# EAGLE board digital-logic _ analog (EAGLE 6.4)
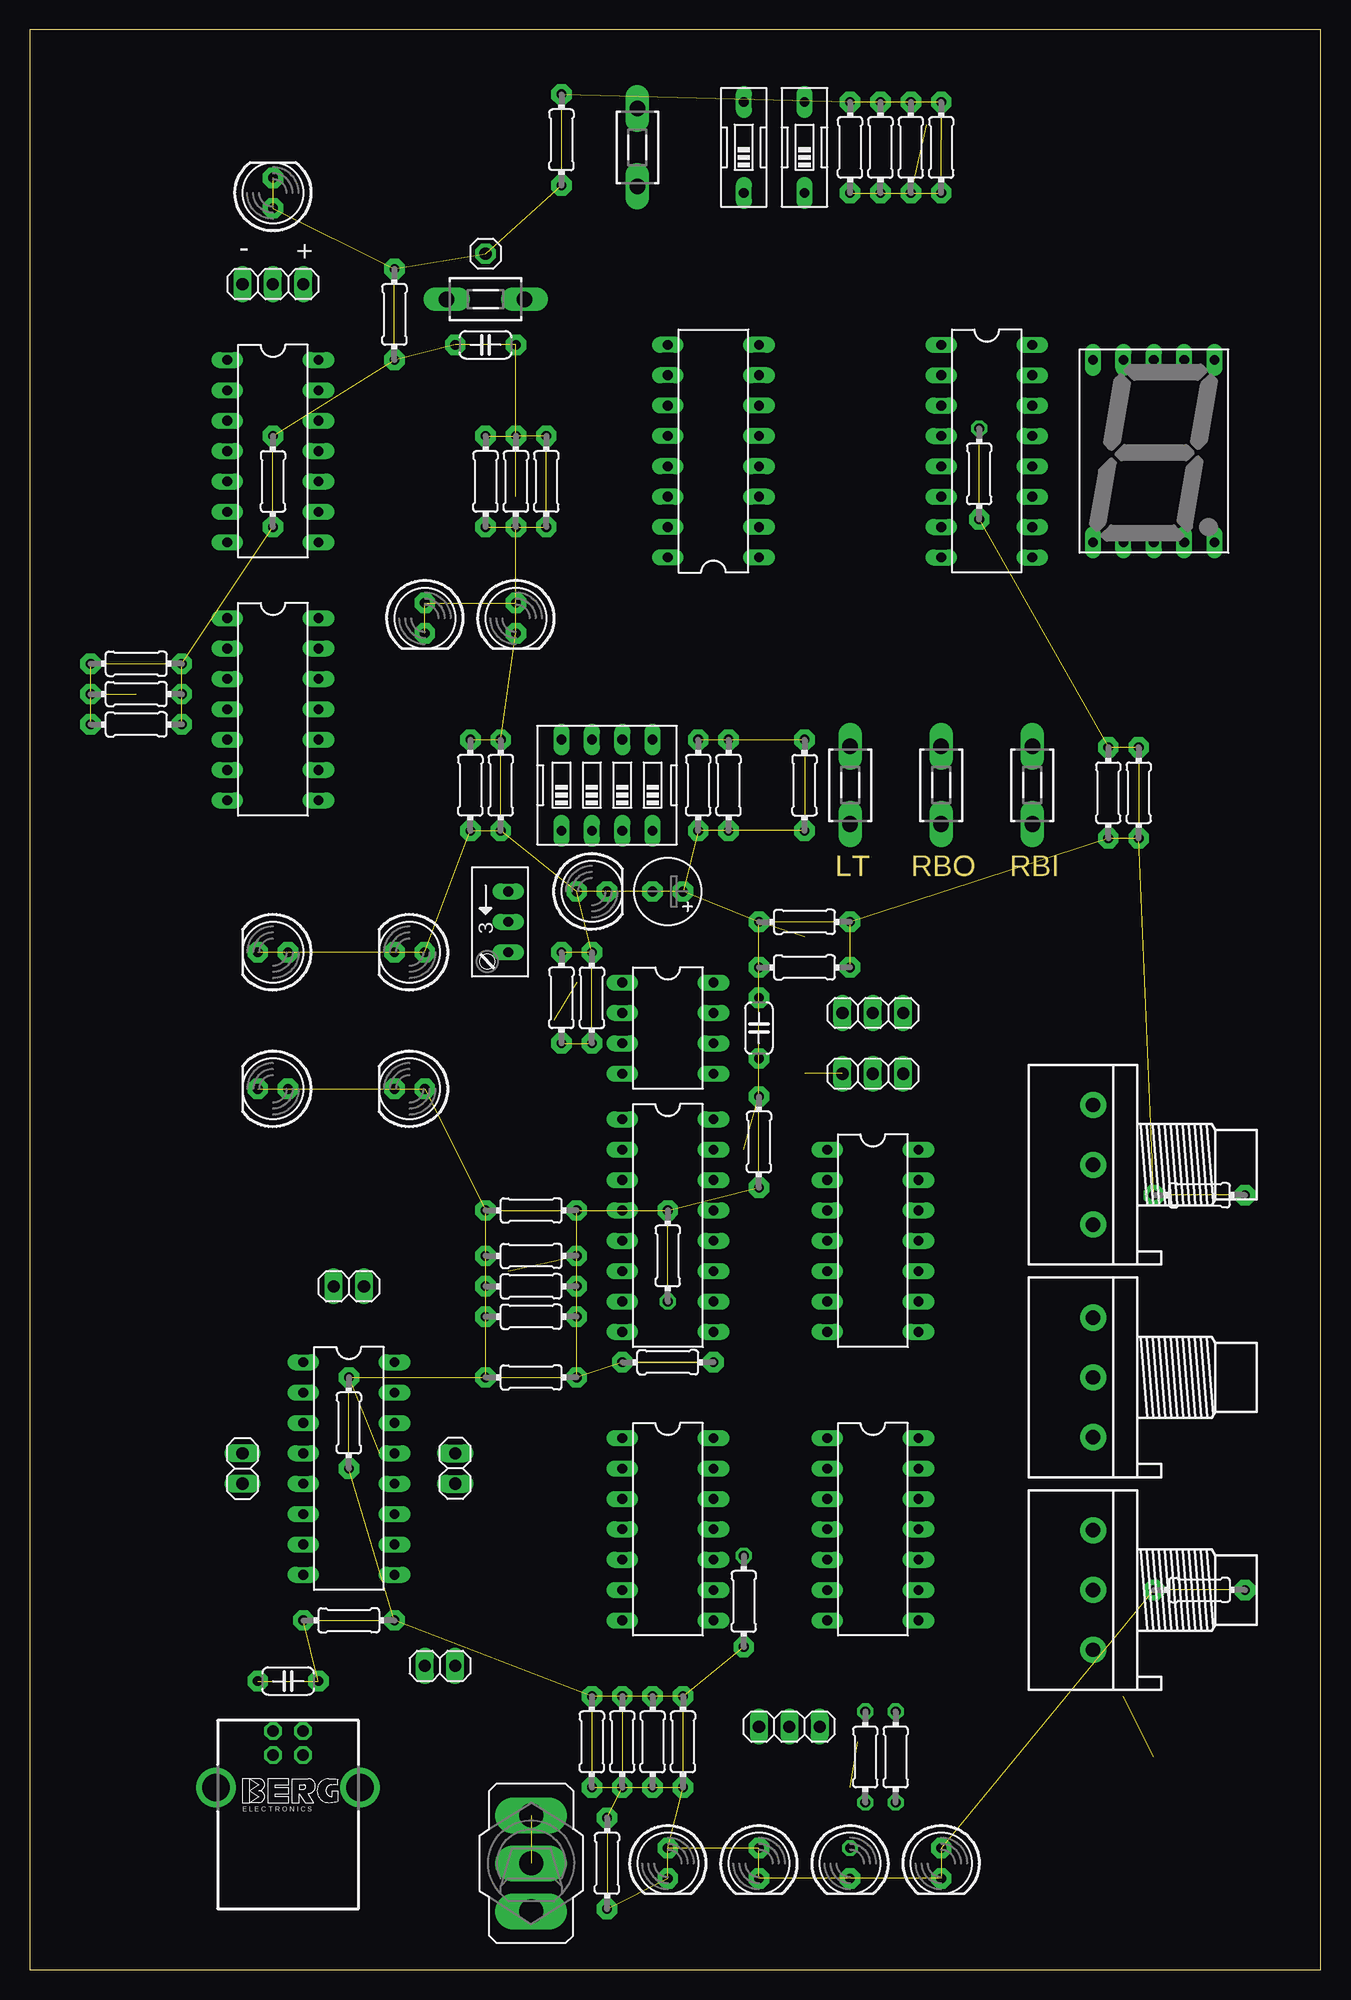
[diagram p0: board, top side]
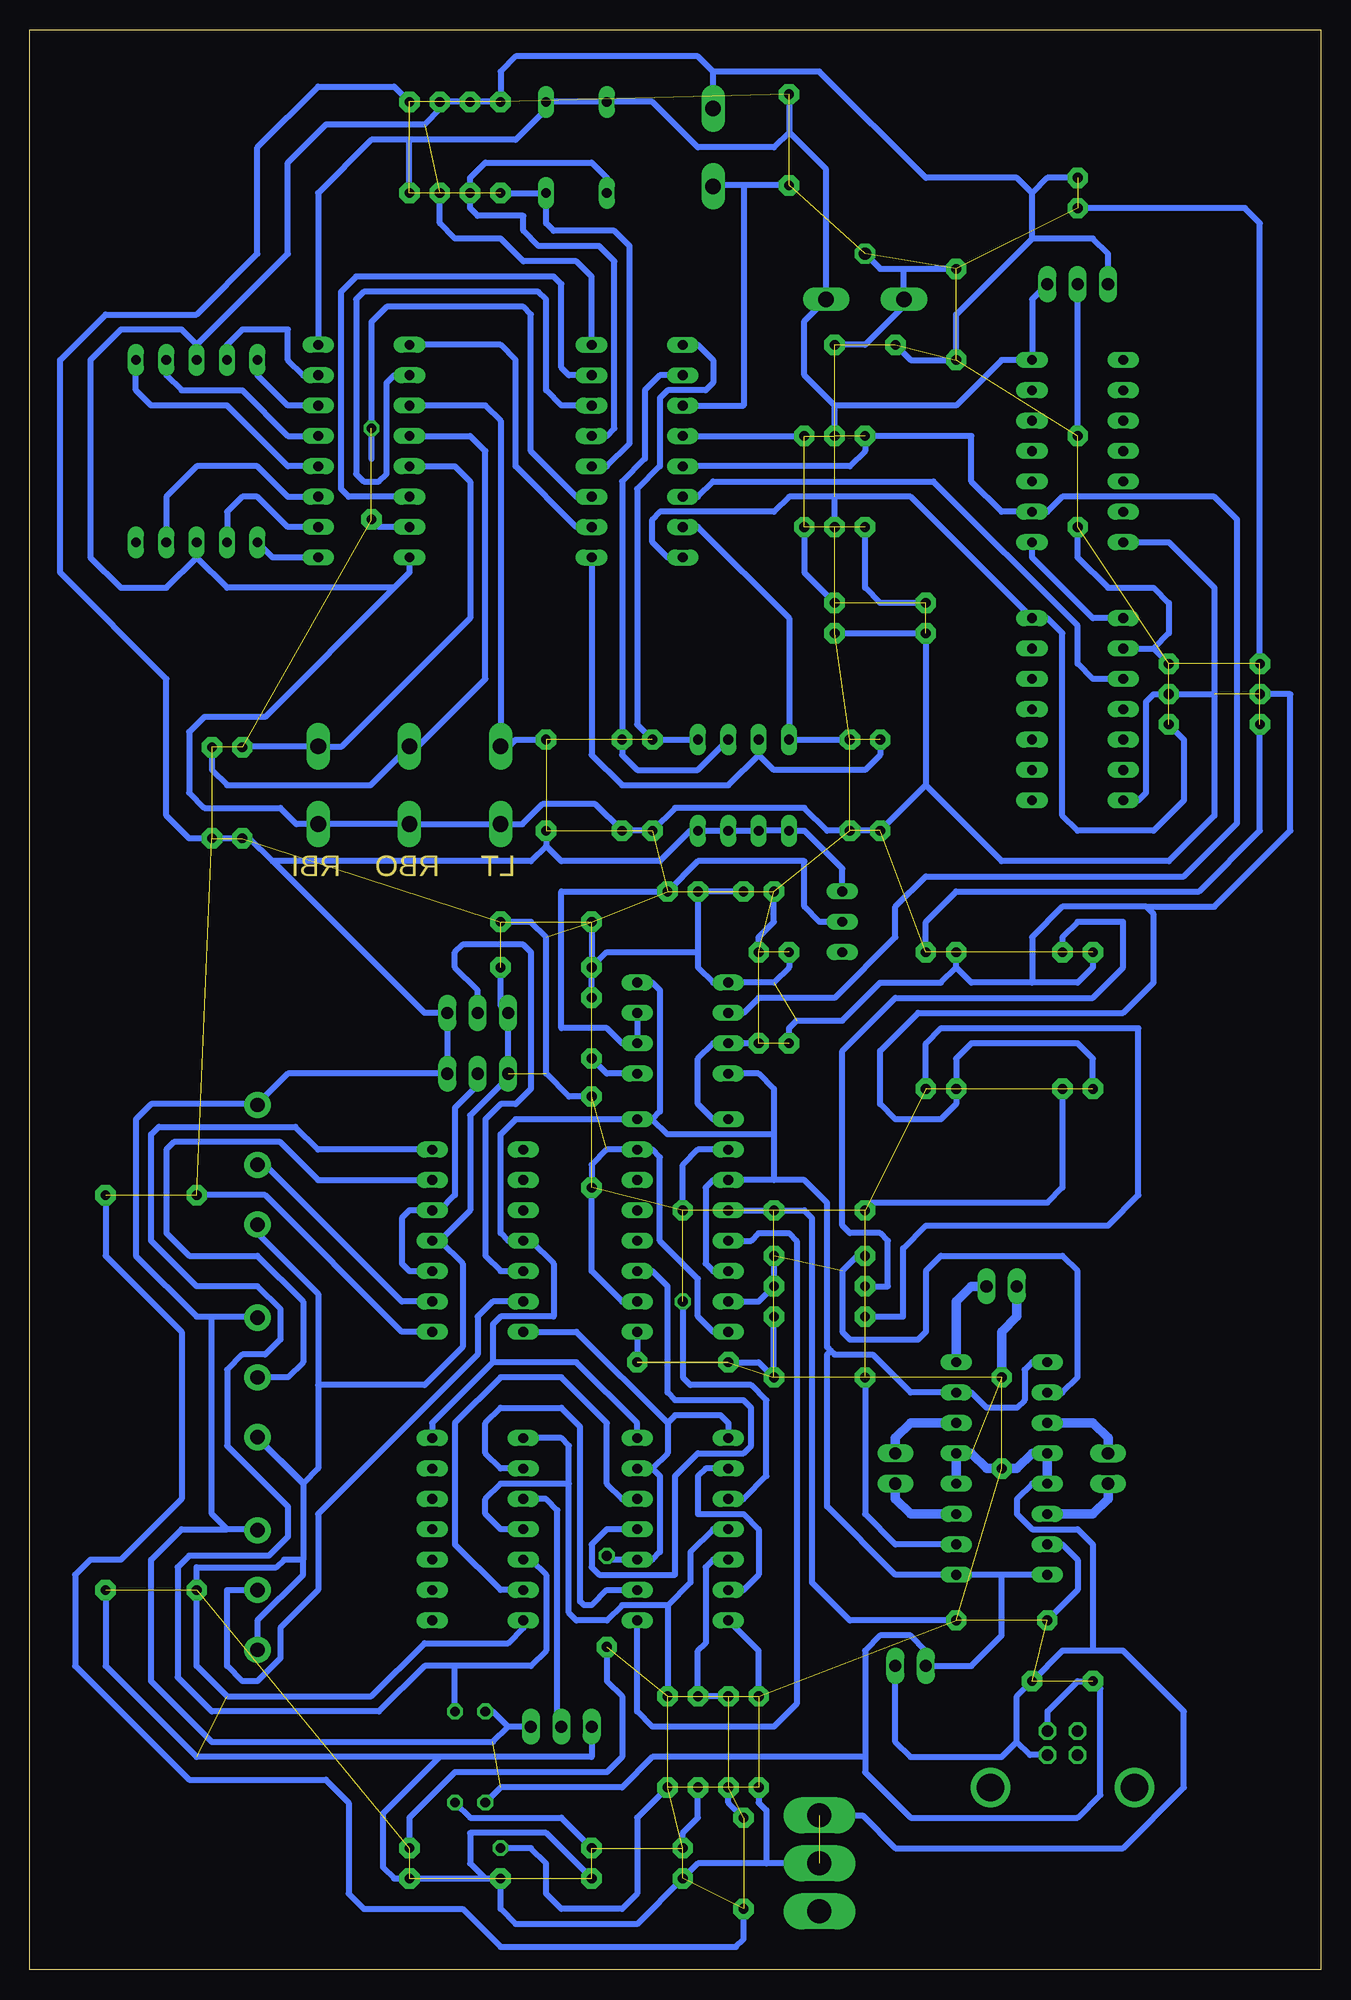
[diagram p1: board, bottom side, seen from below]

Size 107.93 x 162.23 mm. Coordinates in mm from the lower left corner, seen from the top.
Outline: 0,0 107.93,0 107.93,162.23 0,162.23 0,0
Copper layers (1*16): Top 0.035mm / dielectric 1.5mm / Bottom 0.035mm
Design rules "default *": minimum track width 1mm, minimum drill 1mm, track to track 1mm, track to pad 1mm, pad to pad 1mm, via to via 1mm, smd to smd 8mil, copper to edge 0.5mm, drill to drill 1mm, minimum pad ring 10mil, minimum via ring 8mil, stop-mask expansion 4mil, vias tented up to drill 0mil, thermal gap 10mil

## Footprints (pad centres in the part's own frame; a part is rotated, then mirrored left to right if it is on the bottom)
1X03 = drill 1.016 long: 1 -2.54,0; 2 0,0; 3 2.54,0
C050-024X044 = drill 0.813 octagon: 1 -2.54,0; 2 2.54,0
E2,5-6 = drill 0.813 pad 1.6: + -1.27,0 | drill 0.813 pad 1.6 octagon: - 1.27,0
HDSP-M = drill 0.813 long: 1 -5.08,-7.62; 2 -2.54,-7.62; 3 0,-7.62; 4 2.54,-7.62; 5 5.08,-7.62; 6 5.08,7.62; 7 2.54,7.62; 8 0,7.62; 9 -2.54,7.62; 10 -5.08,7.62
DIL16 = drill 0.813 long: 1 -8.89,-3.81; 2 -6.35,-3.81; 3 -3.81,-3.81; 4 -1.27,-3.81; 5 1.27,-3.81; 6 3.81,-3.81; 7 6.35,-3.81; 8 8.89,-3.81; 9 8.89,3.81; 10 6.35,3.81; 11 3.81,3.81; 12 1.27,3.81; 13 -1.27,3.81; 14 -3.81,3.81; 15 -6.35,3.81; 16 -8.89,3.81
DIL14 = drill 0.813 long: 1 -7.62,-3.81; 2 -5.08,-3.81; 3 -2.54,-3.81; 4 0,-3.81; 5 2.54,-3.81; 6 5.08,-3.81; 7 7.62,-3.81; 8 7.62,3.81; 9 5.08,3.81; 10 2.54,3.81; 11 0,3.81; 12 -2.54,3.81; 13 -5.08,3.81; 14 -7.62,3.81
DIL-08 = drill 0.813 long: 1 -3.81,-3.81; 2 -1.27,-3.81; 3 1.27,-3.81; 4 3.81,-3.81; 5 3.81,3.81; 6 1.27,3.81; 7 -1.27,3.81; 8 -3.81,3.81
1X02 = drill 1.016 long: 1 -1.27,0; 2 1.27,0
1X01 = drill 1.016 octagon: 1 0,0
LED5MM = drill 0.813 octagon: A -1.27,0; K 1.27,0
3RP/1610N = drill 1.2 pad 2.184: 1 -5,0; 2 0,0; 3 5,0
0204/7 = drill 0.813 octagon: 1 -3.81,0; 2 3.81,0
RJ9W = drill 0.813 long: A 2.54,0.635; E -2.54,0.635; S 0,0.635
320-916 = drill 2.007 long: 1 0,4.013; 2 0,0; 3 0,-4.013
DTS-3@1 = drill 1.3 long: 1 -3.25,0; 2 3.25,0
EDG-04 = drill 0.813 long: 1 -3.81,-3.81; 2 -1.27,-3.81; 3 1.27,-3.81; 4 3.81,-3.81; 5 3.81,3.81; 6 1.27,3.81; 7 -1.27,3.81; 8 -3.81,3.81
EDG-01 = drill 0.813 long: 1 0,-3.81; 2 0,3.81
PN61729-S = drill 0.95 octagon: 1 1.25,4.71; 2 -1.25,4.71; 3 -1.25,2.71; 4 1.25,2.71 | drill 2.3 pad 2.9: S1 -6.02,0; S2 6.02,0

## Placement (x,y rotation side)
BLACK  [1X03]  20.32,140.97 0 top
C1  10nF  [C050-024X044]  60.96,78.74 90 top
C2  100nF  [C050-024X044]  21.59,24.13 180 top
C3  100nF  [C050-024X044]  38.1,135.89 180 top
C4  1uF  [E2,5-6]  53.34,90.17 180 top
DIS1  HD-H103  [HDSP-M]  93.98,127 0 top
FLAME  [1X03]  70.48,80.01 0 top
IC1  L293D  [DIL16]  26.67,41.91 270 top
IC2  LM324N  [DIL14]  70.48,60.96 270 top
IC3  74LS32N  [DIL14]  53.34,36.83 270 top
IC4  74ALS04N  [DIL14]  70.48,36.83 270 top
IC5  74LS157N  [DIL16]  53.34,62.23 270 top
IC6  74190N  [DIL16]  57.15,127 90 top
IC7  NE555  [DIL-08]  53.34,78.74 270 top
IC8  74LS48N  [DIL16]  80.01,127 270 top
IC9  74LS32N  [DIL14]  20.32,105.41 270 top
IC10  74LS04N  [DIL14]  20.32,127 270 top
IR  [1X03]  63.5,20.32 180 top
JP2  [1X02]  26.67,57.15 0 top
JP3  [1X02]  34.29,25.4 0 top
JP4  [1X02]  17.78,41.91 90 top
JP5  [1X02]  35.56,41.91 270 top
JP7  [1X01]  38.1,143.51 0 top
LED1  [LED5MM]  53.34,8.89 270 top
LED2  [LED5MM]  60.96,8.89 270 top
LED3  [LED5MM]  68.58,8.89 270 top
LED4  [LED5MM]  76.2,8.89 270 top
LED5  [LED5MM]  31.75,85.09 180 top
LED6  [LED5MM]  31.75,73.66 180 top
LED7  [LED5MM]  20.32,85.09 180 top
LED8  [LED5MM]  20.32,73.66 180 top
LED9  [LED5MM]  33.02,113.03 270 top
LED10  [LED5MM]  40.64,113.03 270 top
LED11  [LED5MM]  20.32,148.59 90 top
LED12  [LED5MM]  46.99,90.17 0 top
R1  [3RP/1610N]  88.9,31.75 90 top
R2  [3RP/1610N]  88.9,67.31 90 top
R3  [3RP/1610N]  88.9,49.53 90 top
R4  [0204/7]  8.89,104.14 0 top
R5  [0204/7]  41.91,54.61 0 top
R6  [0204/7]  41.91,57.15 0 top
R7  [0204/7]  41.91,63.5 0 top
R8  [0204/7]  52.07,19.05 90 top
R9  [0204/7]  72.39,17.78 90 top
R10  [0204/7]  54.61,19.05 90 top
R11  [0204/7]  59.69,30.8 90 top
R13  [0204/7]  8.89,109.22 0 top
R14  [0204/7]  43.18,124.46 90 top
R15  [0204/7]  39.37,99.06 90 top
R16  [0204/7]  36.83,99.06 90 top
R17  [0204/7]  58.42,99.06 90 top
R18  [0204/7]  55.88,99.06 90 top
R19  [0204/7]  38.1,124.46 90 top
R20  [0204/7]  92.71,98.42 270 top
R21  [0204/7]  90.17,98.42 270 top
R22  [0204/7]  64.77,99.06 270 top
R23  [0204/7]  68.58,152.4 90 top
R24  [0204/7]  71.12,152.4 90 top
R25  [0204/7]  44.45,153.03 90 top
R26  [0204/7]  30.48,138.43 90 top
R27  0  [0204/7]  79.38,125.09 90 top
R28  0  [0204/7]  73.66,152.4 90 top
R29  0  [0204/7]  40.64,124.46 90 top
R30  0  [0204/7]  41.91,59.69 0 top
R31  0  [0204/7]  53.34,50.8 0 top
R32  0  [0204/7]  41.91,49.53 0 top
R33  0  [0204/7]  46.99,19.05 90 top
R34  0  [0204/7]  26.67,45.72 90 top
R35  0  [0204/7]  53.34,59.69 90 top
R36  0  [0204/7]  20.32,124.46 270 top
R37  0  [0204/7]  44.45,81.28 90 top
R38  0  [0204/7]  69.85,17.78 90 top
R39  0  [0204/7]  97.79,31.75 180 top
R40  0  [0204/7]  8.89,106.68 0 top
R41  0  [0204/7]  76.2,152.4 90 top
R42  0  [0204/7]  64.77,83.82 0 top
R43  0  [0204/7]  60.96,69.22 90 top
R44  0  [0204/7]  64.77,87.63 0 top
R45  0  [0204/7]  26.67,29.21 180 top
R46  0  [0204/7]  97.79,64.77 0 top
R47  0  [0204/7]  48.26,8.89 90 top
R48  0  [0204/7]  49.53,19.05 90 top
R49  [0204/7]  46.99,81.28 270 top
R50  [RJ9W]  39.37,87.63 270 top
S1  [320-916]  41.91,8.89 0 top
S5  DTS-3  [DTS-3@1]  38.1,139.7 180 top
SHARP  [1X03]  70.48,74.93 0 top
SW1  [EDG-04]  48.26,99.06 0 top
SW2  DTS-3  [DTS-3@1]  76.2,99.06 270 top
SW3  DTS-3  [DTS-3@1]  83.82,99.06 270 top
SW4  DTS-3  [DTS-3@1]  68.58,99.06 270 top
SW5  [EDG-01]  64.77,152.4 0 top
SW6  [EDG-01]  59.69,152.4 0 top
SW7  DTS-3  [DTS-3@1]  50.8,152.4 90 top
X1  PN61729-S  [PN61729-S]  21.59,15.24 0 top

## Library data of the parts
BLACK FLAME IR JP2-JP5 JP7 SHARP = pinhead
C1-C4 R4-R11 R13-R49 = rcl
DIS1 = display-hp; OC_FARNELL: unknown; OC_NEWARK: unknown
IC1 = st-microelectronics; MPN: L293D; OC_FARNELL: 9589619; OC_NEWARK: 56P8249
IC2 = linear
IC3-IC6 IC8-IC10 = 74xx-us
IC7 = st-microelectronics; MF: Arrow Electronics; MPN: NE555N; OC_FARNELL: 1467742; OC_NEWARK: 89K1486
LED1-LED12 = led
R1-R3 R50 = pot
S1 = switch
S5 SW2-SW4 SW7 = switch-tact
SW1 SW5 SW6 = special
X1 = con-berg; OC_FARNELL: unknown; OC_NEWARK: unknown

## Nets
BLACK: BLACK.2 IC9.2 R13.2 R36.1 R36.2
CLK: IC6.14 IC9.3
DIS: C4.+ IC7.6 IC7.7 R50.S
FLAME: IC2.7 IC3.1 IC3.10 IC3.13 R11.2
FRONT: IC3.4 IC4.1 IC4.4 R10.2
FRONT': IC4.3 IR.2
GND: BLACK.1 C1.2 C2.1 C3.2 C4.- DIS1.3 DIS1.8 FLAME.1 IC1.4 IC1.5 IC1.12 IC1.13 IC2.11 IC3.7 IC4.7 IC5.8 IC5.10 IC5.15 IC6.8 IC7.1 IC8.8 IC9.7 IC10.7 IR.3 JP2.1 JP3.2 LED1.K LED2.K LED3.K LED4.K LED5.K LED6.K LED7.K LED8.K LED9.K LED10.K LED11.K LED12.K R1.1 R2.1 R3.1 R15.1 R16.1 R17.1 R18.1 R23.2 R24.2 R26.1 R28.1 R28.2 R33.1 R33.2 R34.1 R34.2 R37.1 R37.2 R39.1 R39.2 R40.1 R40.2 R42.1 R42.2 R43.1 R43.2 R44.1 R44.2 S1.1 S1.2 SHARP.1 SW2.2 SW3.2 SW4.2 SW7.2 X1.4
HAMADA: IC1.11 JP5.2
L1: IC1.2 IC5.7 R6.2 R30.1 R30.2
L2: IC1.7 IC5.4 R7.2 R45.1 R45.2
LOGIC_L1: IC3.8 IC5.5
LOGIC_L2: IC3.3 IC5.2 R35.1 R35.2
LOGIC_R2: IC3.11 IC5.11
MAX: IC2.14 IC4.5 R9.2
MIN: IC2.8 IC3.5 R8.2 R46.1 R46.2 R47.1 R47.2 R48.1 R48.2
MOTOR_SUPPLY: IC1.16 JP2.2
N$1: FLAME.2 IC2.5
N$2: IC2.10 IC2.12 SHARP.2
N$3: LED5.A R4.1
N$4: IC3.12 IC4.6
N$5: IC2.6 R1.2
N$6: C1.1 IC7.5
N$7: LED6.A R5.1
N$8: IC3.2 IC3.6
N$9: LED7.A R6.1
N$10: LED8.A R7.1
N$11: IC2.9 R2.2
N$12: IC1.14 JP5.1
N$13: IC1.3 JP4.2
N$14: IC1.6 JP4.1
N$15: LED12.A R49.1
N$16: IC2.13 R3.2
N$17: LED1.A R8.1
N$18: LED11.A R13.1
N$22: IC3.9 IC4.2
N$24: LED2.A R9.1
N$25: LED3.A R10.1
N$26: LED4.A R11.1
N$28: IC9.1 IC10.8
N$40: IC6.3 IC8.7 R27.1 R27.2
N$41: IC6.2 IC8.1
N$42: IC6.6 IC8.2
N$43: IC6.7 IC8.6
N$44: IC6.15 R15.2 SW1.8
N$45: IC6.1 R16.2 SW1.7
N$46: IC6.10 R17.2 SW1.6
N$47: IC6.9 R18.2 SW1.5
N$48: IC6.4 R23.1 SW5.1
N$49: IC6.5 R24.1 SW6.1
N$50: IC6.11 R25.1 SW7.1
N$51: IC8.4 R20.1 SW2.1
N$52: IC8.5 R21.1 SW3.1
N$53: IC8.3 R22.1 SW4.1
N$54: DIS1.7 IC8.13
N$55: DIS1.6 IC8.12
N$56: DIS1.4 IC8.11
N$57: DIS1.2 IC8.10
N$58: DIS1.1 IC8.9
N$59: DIS1.9 IC8.15
N$60: DIS1.10 IC8.14
N$62: IC6.12 R14.2
N$63: LED9.A R19.1
N$64: LED10.A R14.1
N$65: C3.1 JP7.1 R26.2 S5.2
R2: IC1.10 IC5.9 R5.2 R31.1 R31.2 R32.1 R32.2
RCO: IC6.13 IC7.2 IC10.9 R19.2
SENSE: IC5.1 IC7.3 R49.2
VCC: BLACK.3 C2.2 FLAME.3 IC1.1 IC1.8 IC1.9 IC1.15 IC2.4 IC3.14 IC4.14 IC5.3 IC5.6 IC5.16 IC6.16 IC7.4 IC7.8 IC8.16 IC9.14 IC10.14 IR.1 JP3.1 R1.3 R2.3 R3.3 R4.2 R20.2 R21.2 R22.2 R25.2 R29.1 R29.2 R38.1 R38.2 R41.1 R41.2 R50.E S5.1 SHARP.3 SW1.1 SW1.2 SW1.3 SW1.4 SW5.2 SW6.2 X1.1

## Tracks (layer width: path | path; a pad name or v marks a point on that pad's centre or on a via)
BLACK  (1 unrouted)
  Bottom 0.5: 20.32,142.24 BLACK.2 R36.1 | 13.97,110.49 12.7,111.76 12.7,114.3 13.97,115.57 17.78,115.57 20.32,118.11 R36.2 | IC9.2 13.97,110.49 | 13.97,110.49 R13.2
CLK
  Bottom 0.5: IC6.14 52.07,123.19 50.8,124.46 32.38,124.46 20.32,112.39 20.32,109.22 19.05,107.95 IC9.3
DIS
  Bottom 0.5: IC7.7 IC7.6 58.42,77.47 59.69,78.74 63.5,78.74 63.5,90.17 C4.+ 52.07,92.71 43.18,92.71 43.18,88.9 41.91,87.63 R50.S
FLAME
  Bottom 0.5: IC2.7 62.23,53.34 54.61,45.72 | 54.61,45.72 54.61,43.18 55.88,41.91 | IC3.1 49.53,45.72 50.16,46.35 53.98,46.35 54.61,45.72 | IC3.13 55.88,41.91 | 55.88,41.91 55.24,41.27 55.24,34.92 55.88,34.29 IC3.10 59.37,34.29 R11.2
FRONT
  Bottom 0.5: IC4.4 68.58,36.83 69.85,38.1 69.85,39.37 68.58,40.64 62.87,40.64 | IC4.1 63.5,44.45 62.87,43.81 62.87,40.64 | IC3.4 50.8,36.83 52.7,34.92 52.7,32.38 54.61,30.48 | 54.61,30.48 58.42,30.48 59.69,29.21 62.23,29.21 62.87,29.84 62.87,40.64 | 54.61,30.48 R10.2
FRONT'
  Bottom 0.5: IC4.3 64.77,39.37 63.82,38.42 63.82,21.27 63.5,20.95 IR.2
GND  (10 unrouted)
  Bottom 0.5: 88.9,26.67 R1.1 88.9,29.21 85.09,33.02 85.09,34.29 | 73.66,60.96 IC2.11 | 73.66,60.96 71.12,63.5 71.12,71.44 67.94,74.61 SHARP.1 FLAME.1 68.58,80.64 R42.2 | 85.09,40.64 85.09,40.72 R3.1 | 88.9,44.45 85.09,40.64 | 85.09,40.64 85.09,34.29 | 85.09,34.29 86.68,34.29 87.31,33.66 93.98,33.66 R39.2 93.98,25.4 91.44,22.86 79.38,22.86 74.93,27.3 67.94,27.3 66.67,28.57 IC4.7 | R2.1 88.9,61.59 83.82,56.52 83.82,48.9 | 83.82,48.9 74.93,48.9 71.75,52.07 71.75,59.05 73.66,60.96 | 83.82,48.9 83.82,41.91 85.09,40.64 | SW7.2 50.8,158.75 | 50.8,158.75 52.07,160.02 67.31,160.02 68.58,158.75 R23.2 R24.2 R28.2 73.66,155.57 74.93,154.31 83.19,154.31 86.36,151.13 86.36,143.51 93.98,135.89 | 93.98,118.11 91.44,115.57 77.47,115.57 | 93.98,118.11 DIS1.3 | DIS1.8 93.98,135.89 | 93.98,135.89 95.25,137.16 100.33,137.16 102.87,134.62 102.87,118.11 100.33,115.57 96.52,115.57 93.98,118.11 | LED10.K LED9.K 33.02,99.06 | R28.1 73.66,146.05 72.39,144.78 68.58,144.78 66.67,142.88 62.23,142.88 60.96,141.6 IC6.8 | IC8.8 76.2,116.84 77.47,115.57 | 77.47,115.57 88.27,104.78 93.34,104.78 94.61,103.5 94.61,98.42 93.34,97.16 87,97.16 85.65,95.81 SW3.2 SW2.2 SW4.2 66.75,95.81 65.09,97.47 60.64,97.47 R17.1 R18.1 53.98,97.16 43.18,97.16 41.27,95.25 R15.1 R16.1 33.02,99.06 | 52.07,85.09 52.07,83.82 50.8,82.55 IC7.1 45.72,82.55 44.45,83.82 R37.2 | 52.07,85.09 59.69,85.09 R42.1 | C3.2 34.29,134.62 R26.1 30.48,138.43 24.13,144.78 | LED2.K 64.77,11.43 71.12,11.43 71.12,8.89 69.85,7.62 | 69.85,7.62 LED3.K 68.58,5.08 67.31,3.81 57.15,3.81 LED1.K 52.07,8.89 46.35,8.89 | 69.85,7.62 LED4.K 77.47,7.62 78.42,8.57 78.42,13.02 73.66,17.78
  Bottom 0.5: BLACK.1 17.78,143.51 19.05,144.78 24.13,144.78 | LED11.K 22.86,149.86 24.13,148.59 | 33.02,99.06 26.67,92.71 12.7,92.71 8.89,96.52 8.89,106.68 | 8.89,106.68 8.89,115.57 12.7,119.38 IC10.7 | X1.4 24.3,17.95 25.4,19.05 | 25.4,19.05 25.4,22.86 C2.1 21.59,26.67 19.05,26.67 | 25.4,19.05 26.67,17.78 34.29,17.78 35.56,19.05 JP3.2 | 24.13,144.78 24.13,148.59 | 24.13,148.59 25.4,149.86 33.02,149.86 41.91,158.75 50.8,158.75 | S1.1 38.3,12.9 35.56,10.16 16.51,10.16 11.43,15.24 11.43,21.59 16.51,26.67 19.05,26.67 | LED7.K 19.05,83.82 20.32,82.55 24.13,82.55 | 24.13,82.55 29.21,82.55 30.48,83.82 | 30.48,83.82 LED5.K | LED8.K 19.05,76.2 20.32,77.47 29.21,77.47 30.48,76.2 LED6.K 30.48,72.39 31.75,71.12 35.56,71.12 36.83,72.39 36.83,76.83 33.66,80.01 16.51,80.01 13.97,82.55 13.97,88.27 14.61,88.9 | 14.61,88.9 21.59,88.9 24.13,86.36 24.13,82.55 | IC5.8 50.8,53.34 52.07,54.61 52.07,57.78 55.24,60.96 55.24,67.94 55.88,68.58 IC5.15 59.69,68.58 60.96,67.31 R43.1 60.96,58.42 58.42,55.88 IC5.10 | 30.48,83.82 31.75,82.55 36.83,82.55 40.01,79.38 43.81,79.38 44.45,78.74 R37.1 | IC1.5 24.13,40.64 25.4,39.37 25.4,38.1 24.13,36.83 20.32,36.83 19.05,35.56 19.05,26.67 | S1.2 46.35,8.89 | R33.2 46.99,26.67 IC3.7 | 73.66,17.78 60.96,17.78 IR.3 | 14.61,88.9 8.89,88.9 2.54,95.25 2.54,106.68 R40.1 | 73.66,17.78 93.98,17.78 101.6,25.4 R39.1 | 8.89,106.68 R40.2 13.97,106.68 14.61,106.05 14.61,98.42 15.24,97.79 IC9.7 | R43.2 62.87,73.03 64.77,74.93 64.77,86.36 66.04,87.63 R44.2 | C1.2 R42.1 | R44.1 R42.1 | 52.07,85.09 C4.- LED12.K | R33.1 46.99,13.97 46.35,13.34 46.35,8.89
  Bottom 0.8: IC1.5 IC1.4 24.13,43.18 25.4,41.91 R34.1 27.94,41.91 29.21,43.18 IC1.13 IC1.12 | R34.2 26.67,53.34 25.4,54.61 JP2.1
HAMADA
  Bottom 0.8: JP5.2 35.56,39.37 34.29,38.1 IC1.11
L1  (1 unrouted)
  Bottom 0.5: IC1.2 21.59,48.26 20.32,49.53 20.32,58.42 21.59,59.69 31.75,59.69 33.02,58.42 33.02,53.34 33.66,52.7 39.37,52.7 40.01,53.34 40.01,58.42 38.73,59.69 R30.1 | R30.2 R6.2 46.99,55.88 IC5.7
L2  (1 unrouted)
  Bottom 0.5: IC5.4 R7.2 43.18,63.5 42.55,62.87 42.55,32.38 39.37,29.21 R45.1 | IC1.7 21.59,35.56 20.32,34.29 20.32,31.75 R45.2
LOGIC_L1
  Bottom 0.5: IC3.8 57.15,21.59 55.88,20.32 45.72,20.32 43.81,22.23 43.81,60.96 44.45,61.59 46.99,61.59 47.62,60.96 IC5.5
LOGIC_L2  (1 unrouted)
  Bottom 0.5: IC3.3 48.26,39.37 46.35,41.27 46.35,47.62 47.62,48.9 52.7,48.9 53.34,49.53 R35.1 | IC5.2 52.07,68.58 53.34,67.31 R35.2
LOGIC_R2
  Bottom 0.5: IC3.11 59.69,36.83 60.96,35.56 60.96,33.66 60.33,33.02 53.98,33.02 53.98,41.27 52.07,43.18 48.26,43.18 47.62,43.81 47.62,46.99 48.26,47.62 53.98,47.62 54.61,48.26 54.61,57.15 55.88,58.42 IC5.11
MAX
  Bottom 0.5: IC2.14 83.82,68.58 85.72,70.48 97.16,70.48 97.79,69.85 97.79,60.96 93.98,57.15 88.9,57.15 87,55.24 87,52.7 88.27,51.44 90.17,51.44 91.44,50.16 91.44,43.81 86.36,38.73 86.36,36.2 87.95,34.61 94.61,34.61 95.57,33.66 95.57,24.45 92.71,21.59 78.74,21.59 74.93,25.4 72.39,25.4 | 72.39,25.4 66.04,25.4 64.77,26.67 64.77,33.02 66.04,34.29 IC4.5 | R9.2 72.39,25.4
MIN  (3 unrouted)
  Bottom 0.5: IC3.5 50.8,34.29 51.44,33.66 51.44,27.3 52.07,26.67 R8.2 R48.2 | IC2.8 76.83,53.34 88.27,64.77 R46.1 | R46.2 101.6,59.69 95.25,53.34 95.25,39.37 100.33,34.29 102.87,34.29 104.14,33.02 104.14,25.4 94.61,15.88 83.19,15.88 81.28,13.97 81.28,6.35 80.01,5.08 71.75,5.08 68.58,1.91 48.9,1.91 48.26,2.54 R47.1 | R47.2 49.53,13.97 R48.1
MOTOR_SUPPLY
  Bottom 0.8: JP2.2 29.21,57.15 30.48,55.88 IC1.16
N$1
  Bottom 0.5: IC2.5 68.58,58.42 69.85,59.69 69.85,71.12 68.58,72.39 67.31,72.39 66.04,73.66 66.04,85.09 66.67,85.72 71.75,85.72 72.39,85.09 72.39,83.82 70.48,81.92 FLAME.2
N$2
  Bottom 0.5: SHARP.2 70.48,73.98 72.39,72.07 72.39,64.77 73.66,63.5 IC2.12 76.2,63.5 76.83,62.87 76.83,59.05 76.2,58.42 IC2.10
N$3
  Bottom 0.5: LED5.A 33.02,87.63 30.48,90.17 10.16,90.17 5.08,95.25 R4.1
N$4
  Bottom 0.5: IC4.6 68.58,31.75 72.39,35.56 72.39,45.72 68.58,49.53 63.5,49.53 59.69,45.72 59.69,40.64 58.42,39.37 IC3.12
N$5
  Bottom 0.5: IC2.6 69.22,55.88 70.48,54.61 70.48,51.44 83.82,38.1 83.82,31.75 87,28.57 87,26.04 88.9,24.13 90.17,24.13 91.44,25.4 91.44,31.75 R1.2
N$6
  Bottom 0.5: IC7.5 59.69,74.93 C1.1
N$7
  Bottom 0.5: R5.1 34.92,54.61 34.92,60.33 33.02,62.23 17.78,62.23 15.24,64.77 15.24,78.74 31.75,78.74 33.02,77.47 LED6.A
N$8
  Bottom 0.5: IC3.2 51.44,41.91 52.07,41.27 52.07,38.1 48.26,38.1 46.99,36.83 46.99,33.02 48.26,31.75 IC3.6
N$9
  Bottom 0.5: R6.1 36.2,57.15 36.2,60.96 36.83,61.59 39.37,61.59 40.01,62.23 40.01,76.83 35.56,81.28 19.05,81.28 16.51,83.82 16.51,87.63 20.32,87.63 21.59,86.36 LED7.A
N$10
  Bottom 0.5: LED8.A 21.59,65.41 22.86,64.14 37.47,64.14 R7.1
N$11
  Bottom 0.5: IC2.9 76.83,55.88 88.27,67.31 R2.2
N$12
  Bottom 0.8: IC1.14 34.29,45.72 35.56,44.45 JP5.1
N$13
  Bottom 0.8: JP4.2 17.78,44.45 19.05,45.72 IC1.3
N$14
  Bottom 0.8: JP4.1 17.78,39.37 19.05,38.1 IC1.6
N$15
  Bottom 0.5: R49.1 46.99,86.36 45.72,87.63 LED12.A
N$16
  Bottom 0.5: IC2.13 83.82,66.04 87,69.22 95.89,69.22 96.52,68.58 96.52,61.59 94.61,59.69 88.9,59.69 85.09,55.88 85.09,50.8 86.36,49.53 R3.2
N$17
  Bottom 0.5: LED1.A 53.34,11.43 52.07,12.7 R8.1
N$18
  Bottom 0.5: R13.1 5.08,146.05 6.35,147.32 LED11.A
N$19  (via drill 0.6 pad 1.7)  (114 unrouted)
  other vias: 48.26,12.7 30.48,142.24 30.48,134.62 20.32,120.65 20.32,128.27 38.1,128.27 40.64,128.27 43.18,128.27 38.1,120.65 40.64,120.65 43.18,120.65 44.45,149.22 44.45,156.84 68.58,148.59 68.58,156.21 71.12,156.21 71.12,148.59 73.66,148.59 73.66,156.21 76.2,148.59 76.2,156.21 79.38,121.28 5.08,109.22 5.08,106.68 5.08,104.14 12.7,109.22 12.7,106.68 12.7,104.14 35.56,135.89 40.64,135.89 20.32,147.32 20.32,149.86 40.64,114.3 40.64,111.76 33.02,114.3 33.02,111.76 36.83,102.87 39.37,102.87 36.83,95.25 39.37,95.25 55.88,102.87 58.42,102.87 58.42,95.25 55.88,95.25 64.77,102.87 64.77,95.25 92.71,102.23 90.17,102.23 90.17,94.61 92.71,94.61 19.05,85.09 21.59,85.09 19.05,73.66 21.59,73.66 30.48,85.09 33.02,85.09 30.48,73.66 33.02,73.66 44.45,85.09 44.45,77.47 46.99,85.09 46.99,77.47 60.96,87.63 68.58,87.63 68.58,83.82 60.96,83.82 60.96,81.28 60.96,76.2 60.96,73.03 45.72,63.5 45.72,90.17 48.26,90.17 52.07,90.17 54.61,90.17 53.34,63.5 60.96,65.41 38.1,63.5 38.1,59.69 38.1,57.15 38.1,54.61 45.72,54.61 45.72,57.15 45.72,59.69 45.72,49.53 38.1,49.53 57.15,50.8 49.53,50.8 59.69,26.99 54.61,15.24 52.07,15.24 49.53,15.24 46.99,15.24 46.99,22.86 49.53,22.86 52.07,22.86 54.61,22.86 24.13,24.13 19.05,24.13 30.48,29.21 22.86,29.21 26.67,41.91 26.67,49.53 93.98,31.75 101.6,31.75 93.98,64.77 101.6,64.77 53.34,10.16 53.34,7.62 60.96,10.16 60.96,7.62 48.26,5.08 68.58,7.62 76.2,10.16 76.2,7.62 38.1,143.51
N$22
  Bottom 0.5: IC4.2 68.58,41.91 69.85,43.18 69.85,45.72 68.58,46.99 63.5,46.99 61.91,45.4 61.91,30.8 61.59,30.48 60.96,30.48 59.69,31.75 IC3.9
N$24
  Bottom 0.5: LED2.A 63.5,12.7 71.12,12.7 R9.1
N$25
  Bottom 0.5: LED3.A 66.04,10.16 64.77,8.89 64.77,6.35 63.5,5.08 58.42,5.08 57.15,6.35 57.15,12.7 R10.1
N$26
  Bottom 0.5: R11.1 59.69,24.13 58.42,22.86 58.42,17.78 59.69,16.51 72.39,16.51 76.2,12.7 LED4.A
N$28
  Bottom 0.5: IC9.1 19.05,113.03 24.13,118.11 IC10.8
N$40  (2 unrouted)
  Bottom 0.5: IC6.3 62.23,123.19 66.04,127 66.04,138.43 66.67,139.06 78.11,139.06 79.38,137.79 79.38,126.36 | IC8.7 78.74,120.65 R27.1
N$41
  Bottom 0.5: IC6.2 62.23,120.65 67.31,125.73 67.31,134.62 68.58,135.89 IC8.1
N$42
  Bottom 0.5: IC6.6 63.5,130.81 64.77,132.08 64.77,139.7 65.41,140.34 80.01,140.34 80.64,139.7 80.64,125.09 80.01,124.46 78.74,124.46 78.11,125.09 78.11,132.72 77.47,133.35 IC8.2
N$43
  Bottom 0.5: IC6.7 62.87,133.35 63.5,133.99 63.5,140.97 64.14,141.6 80.64,141.6 81.92,140.34 81.92,123.83 81.28,123.19 IC8.6
N$44
  Bottom 0.5: IC6.15 52.07,120.65 44.45,113.03 SW1.8 R15.2
N$45
  Bottom 0.5: R16.2 36.83,101.6 38.1,100.33 45.72,100.33 46.99,101.6 | 46.99,101.6 SW1.7 | IC6.1 60.96,101.6 58.42,99.06 49.53,99.06 46.99,101.6
N$46
  Bottom 0.5: SW1.6 52.07,100.33 57.15,100.33 58.42,101.6 R17.2 58.42,124.46 56.52,126.36 56.52,132.08 55.24,133.35 IC6.10
N$47
  Bottom 0.5: SW1.5 R18.2 57.15,104.14 57.15,123.83 55.24,125.73 55.24,131.44 54.61,132.08 51.44,132.08 50.8,132.72 50.8,134.62 52.07,135.89 IC6.9
N$48
  Bottom 0.5: R23.1 SW5.1 64.77,146.05 64.14,145.41 59.05,145.41 57.78,144.15 57.78,127.64 59.69,125.73 IC6.4
N$49
  Bottom 0.5: SW6.1 59.69,149.86 60.96,151.13 69.85,151.13 71.12,149.86 R24.1 71.12,147.32 70.48,146.69 66.67,146.69 66.67,145.41 65.41,144.15 60.33,144.15 59.05,142.88 59.05,128.91 59.69,128.27 IC6.5
N$50
  Bottom 0.5: R25.1 48.26,149.22 | 48.26,149.22 50.73,149.22 SW7.1 | IC6.11 48.26,130.81 48.26,149.22
N$51
  Bottom 0.5: R20.1 92.71,100.33 91.44,99.06 79.45,99.06 SW2.1 75.49,102.31 69.85,107.95 69.85,127 71.12,128.27 IC8.4
N$52
  Top 0.5: 90.09,102.31 R21.1
  Bottom 0.5: IC8.5 72.39,125.73 71.12,124.46 71.12,113.03 81.84,102.31 SW3.1 90.09,102.31 R21.1
N$53
  Bottom 0.5: IC8.3 69.85,130.81 68.58,129.54 SW4.1 67.87,102.31 67.31,102.87 R22.1
N$54
  Bottom 0.5: DIS1.7 96.52,133.35 95.25,132.08 90.17,132.08 86.36,128.27 IC8.13
N$55
  Bottom 0.5: IC8.12 86.36,125.73 91.44,130.81 97.79,130.81 99.06,132.08 DIS1.6
N$56
  Bottom 0.5: DIS1.4 96.52,123.19 93.98,125.73 88.9,125.73 86.36,123.19 IC8.11
N$57
  Bottom 0.5: DIS1.2 91.44,121.92 90.17,123.19 88.9,123.19 86.36,120.65 IC8.10
N$58
  Bottom 0.5: DIS1.1 87.63,118.11 IC8.9
N$59
  Bottom 0.5: DIS1.9 91.44,135.89 90.17,137.16 86.36,137.16 86.36,134.62 85.09,133.35 IC8.15
N$60
  Bottom 0.5: IC8.14 86.36,130.81 88.9,133.35 DIS1.10
N$62
  Bottom 0.5: IC6.12 R14.2
N$63
  Bottom 0.5: LED9.A 36.83,114.3 38.1,115.57 R19.1
N$64
  Bottom 0.5: R14.1 43.18,116.84 LED10.A
N$65
  Bottom 0.5: 32.31,142.24 R26.2 34.92,142.24 | JP7.1 36.83,142.24 34.92,142.24 | 34.92,142.24 34.85,142.16 S5.2 34.85,139.14 38.1,135.89 C3.1
R2  (2 unrouted)
  Bottom 0.5: IC1.10 35.56,35.56 38.1,38.1 R32.1 | IC5.9 R31.2 | R5.2 R32.2 46.99,50.8 R31.1
RCO
  Bottom 0.5: IC6.13 39.37,125.73 38.1,127 R19.2 29.21,128.27 29.21,124.46 26.67,121.92 IC10.9 22.86,121.92 21.59,123.19 8.89,123.19 6.99,121.28 6.99,95.89 11.43,91.44 33.02,91.44 35.56,88.9 35.56,86.36 40.64,81.28 46.99,81.28 48.26,80.01 IC7.2
SENSE
  Bottom 0.5: IC5.1 50.8,71.12 52.07,72.39 52.07,76.2 50.8,77.47 IC7.3 R49.2
VCC  (3 unrouted)
  Bottom 0.5: 73.66,74.93 SHARP.3 FLAME.3 74.93,80.01 87.63,92.71 | 88.9,72.39 R2.3 | R1.3 88.9,36.83 91.44,36.83 | 88.9,54.61 R3.3 88.98,54.61 92.71,54.61 | 91.44,36.83 92.71,38.1 92.71,54.61 | 73.03,75.56 73.66,74.93 | 73.66,74.93 86.36,74.93 88.9,72.39 | 91.44,36.83 95.25,36.83 97.79,34.29 97.79,24.13 92.71,19.05 69.22,19.05 67.94,20.32 | IC3.14 57.15,45.72 62.23,50.8 69.22,50.8 | 69.22,50.8 74.3,45.72 IC4.14 | 69.22,50.8 69.22,53.98 68.58,54.61 64.14,54.61 64.14,59.05 66.04,60.96 IC2.4 67.94,60.96 68.58,61.59 68.58,69.85 67.31,71.12 IC5.16 55.88,71.12 | 76.2,153.03 67.31,153.03 64.77,155.57 SW5.2 SW6.2 55.88,156.21 52.07,152.4 45.72,152.4 44.45,153.67 | 76.2,153.03 79.38,153.03 83.82,148.59 IC8.16 | 64.77,93.98 63.5,92.71 55.24,92.71 52.7,95.25 SW1.4 SW1.3 SW1.2 SW1.1 43.18,95.25 40.01,92.08 R50.E | R25.2 44.45,153.67 | R22.2 64.77,93.98 | 64.77,93.98 66.04,92.71 87.63,92.71 | IC6.16 54.61,118.11 55.88,119.38 55.88,121.28 55.24,121.92 45.72,121.92 44.45,123.19 40.64,123.19 | 40.64,123.19 34.29,123.19 IC9.14 22.86,113.03 21.59,111.76 21.59,96.52 20.32,95.25 13.97,95.25 11.43,97.79 11.43,102.87 R4.2 | BLACK.3 24.13,139.7 IC10.14 26.67,134.62 30.48,130.81 40.64,130.81 | IC5.6 50.8,58.42 51.44,59.05 51.44,65.41 50.8,66.04 IC5.3 45.72,66.04 | 45.72,69.85 54.61,69.85 55.88,71.12 | IC7.8 55.88,82.55 55.24,81.92 55.24,71.75 55.88,71.12 | 44.45,153.67 41.35,150.57 S5.1 43.18,137.87 43.18,133.35 40.64,130.81 | R29.2 40.64,130.81 | R29.1 40.64,123.19 | 45.72,69.85 45.72,66.04 | 45.72,66.04 43.18,66.04 41.27,64.14 41.27,52.07 40.96,51.75 | 40.96,51.75 40.64,51.44 37.47,51.44 34.29,48.26 IC1.15 29.21,48.26 27.94,46.99 25.4,46.99 24.77,47.62 24.77,50.16 24.13,50.8 IC1.1
  Bottom 0.5: X1.1 22.84,21.61 20.32,24.13 C2.2 18.41,23.5 18.41,14.61 20.32,12.7 34.29,12.7 38.1,16.51 38.1,17.78 | 40.96,51.75 41.27,51.44 41.27,38.73 35.56,33.02 IC1.9 26.67,33.02 | 45.72,69.85 45.72,73.66 46.99,74.93 IC7.4 | IC1.8 26.67,33.02 | IR.1 67.94,20.32 | 38.1,17.78 38.1,26.67 36.83,27.94 34.29,27.94 33.02,26.67 JP3.1 29.21,25.4 26.67,27.94 26.67,33.02 | 38.1,17.78 55.88,17.78 58.42,15.24 68.58,15.24 R38.1 | R41.2 77.47,157.48 83.82,157.48 88.9,152.4 88.9,143.51 93.98,138.43 101.6,138.43 105.41,134.62 105.41,116.84 96.52,107.95 96.52,96.52 94.61,94.61 R20.2 R21.2 89.53,94.61 87.63,92.71 | R41.1 76.2,153.03 | R38.2 69.22,21.59 67.94,20.32 | 88.9,72.39 97.79,72.39 99.06,71.12 99.06,59.69 93.98,54.61 92.71,54.61

## Text on the board
Dimension: LT | RBO | RBI
tPlace: - | +
tOrigins: E | D | Load | Black | 7448 | 7404 | 7432 | 74190 | RCO | Max/Min | L1 | R1 | 555 | Flame | - | + | Sharp | LM324 | L2 | R2 | 74157 | Motor Supply | - | + | Min | L293 | 7404 | 7432 | R1 | L1 | Max | L2 | R2 | - | IR | Flame | + | - | + | Min | Max | Front | Flame